# Altium PCB LM555PCB.PcbDoc
Units mil, origin at the board's own origin, x right, y up, seen from the top; angles counter-clockwise.
Board outline 3394.99 x 2335.36 mil, 2 copper layers (Top Layer, Bottom Layer); 1 components, 0 nets, 8 pads, 0 vias.
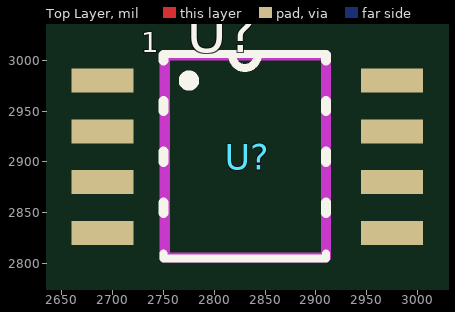
[diagram p0: Top Layer view]
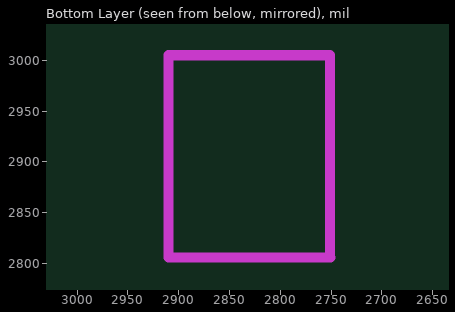
[diagram p1: Bottom Layer view, seen from below]

## Layer stack, top to bottom
Top Solder: solder mask 0.4, Solder Resist, Dk 3.5
Top Layer: signal copper 1.4
Dielectric 1: dielectric 12.6, FR-4, Dk 4.8
Bottom Layer: signal copper 1.4
Bottom Solder: solder mask 0.4, Solder Resist, Dk 3.5

## Board outline
2067.5,2067.5 4830,1469.63 4830,3805 1435.01,3805

## Design rules (kind name [scope] priority, off if disabled: settings)
Clearance [All] p1: gap=10 ignorepadtopadclearanceinfootprint=FALSE except(0: Arc-Hole Track-Hole SMDPad-Hole THPad-Hole Via-Hole Fill-Hole Poly-Hole Region-Hole Text-Hole)
PolygonConnect [All] p1: connectstyle=Relief reliefconductorwidth=10 reliefentries=4 polygonreliefangle="90 Angle" airgapwidth=10
RoutingVias [All] p1: holewidth=28 width=50 viastyle="Through Hole" minholewidth=28 minwidth=50 maxholewidth=28 maxwidth=50
SolderMaskExpansion [All] p1: expansion=4 istentingtop=FALSE
Width [All] p1: maxlimit=10 minlimit=10 preferedwidth=10
30 further rules are at their usual default settings.

## Components (designator, comment, footprint, x,y, rotation, side; value= is the part's Value field where it differs from the comment)
U? "555 Timer IC" LM555 2830,2905 r0 top

## Footprints (in the part's own frame and the unit in brackets; to place one, negate y for a bottom-side part, rotate by r counter-clockwise, add the part's x,y. Pads: shape width x height; smd on the part's side, far side on the other; paste and mask are expansions set on the pad)
LM555 [mm]
  rect 1.55x0.6 smd paste+0.07: 1(-3.556,1.905) 2(-3.556,0.635) 3(-3.556,-0.635) 4(-3.556,-1.905) 5(3.683,-1.905) 6(3.683,-0.635) 7(3.683,0.635) 8(3.683,1.905)
  Keep-Out Layer lines w0.254: -2.002,-2.51 -2.007,-2.515 2.007,-2.515 ; -2.002,-2.503 -2.002,2.54 2.032,2.54 2.032,-2.515
  silkscreen extent -2.03,-2.54 2.03,2.57, body extent -4.2,-2.69 4.2,2.69, height 2.35

## Part data
U?: library part LM555CM, "TEXAS INSTRUMENTS         LM555CM            IC, TIMER, SMD, SOIC8, 555", Case/Package=SOIC, Current Rating=3mA, Frequency=100kHz, High Level Output Current=-200mA, Low Level Output Current=200mA, Manufacturer="TI National Semiconductor", Max Operating Temperature=70°C, Max Power Dissipation=1.18W, Max Supply Voltage=16V, Min Operating Temperature=0°C, Min Supply Voltage=4.5V, Operating Supply Current=10mA, Package Quantity=95, Supplier Part Number 1=926-LM555CM, Category="Timers and Oscillators", ComponentLink1Description=https://datasheet.ciiva.com/1592/1767362-1592763.pdf?src-supplier=Newark, ComponentLink1URL=https://datasheet.ciiva.com/1592/1767362-1592763.pdf?src-supplier=Newark, ComponentLink2Description=https://datasheet.ciiva.com/1139/1896155-1139384.pdf?src-supplier=Element14, ComponentLink2URL=https://datasheet.ciiva.com/1139/1896155-1139384.pdf?src-supplier=Element14, Contact Plating=Tin,Lead, Lead Free="Lead Free", Manufacturer Part Number=LM555CM, Mount="Surface Mount", Nominal Supply Current=3mA, Number of Channels=1, Number of Pins=8, Number of Timers/Counters=1, Output Current=200mA, Packaging=Rail/Tube, Power Dissipation=1.18W, Pricing 1="665=0.99400, 1045=0.82400, 2565=0.76700, 5035=0.73900, 10070=0.71000 (USD)", Quiescent Current=3mA, Radiation Hardening=No, REACH SVHC="No SVHC", RoHS=Yes, Supplier 1=Mouser

## Nets (pads, with @x,y where several pads share a name; then routed paths per layer and width w, separated by ;. In a path a pad name is that pad's centre, name@x,y a point inside that pad or via, vN(x,y) a via of type N, cw(c..) or ccw(c..) an arc to the next point about the centre after c; other vN are vias at no path point)
pads on no net: U?.1 U?.2 U?.3 U?.4 U?.5 U?.6 U?.7 U?.8

## Text inside footprints (layer, text, board x,y; h text height)
U?: Top Overlay "1" at 2727.87,3007.87 h19.68; Mechanical 1 "1" at 2727.87,3007.87 h19.68